# Altium PCB FLYING_DIVING.PcbDoc
Units mm, origin at the board's own origin, x right, y up, seen from the top; angles counter-clockwise.
Board outline 100.23 x 49.95 mm, 2 copper layers (Top Layer, Bottom Layer); 22 components, 41 nets, 142 pads, 43 vias.
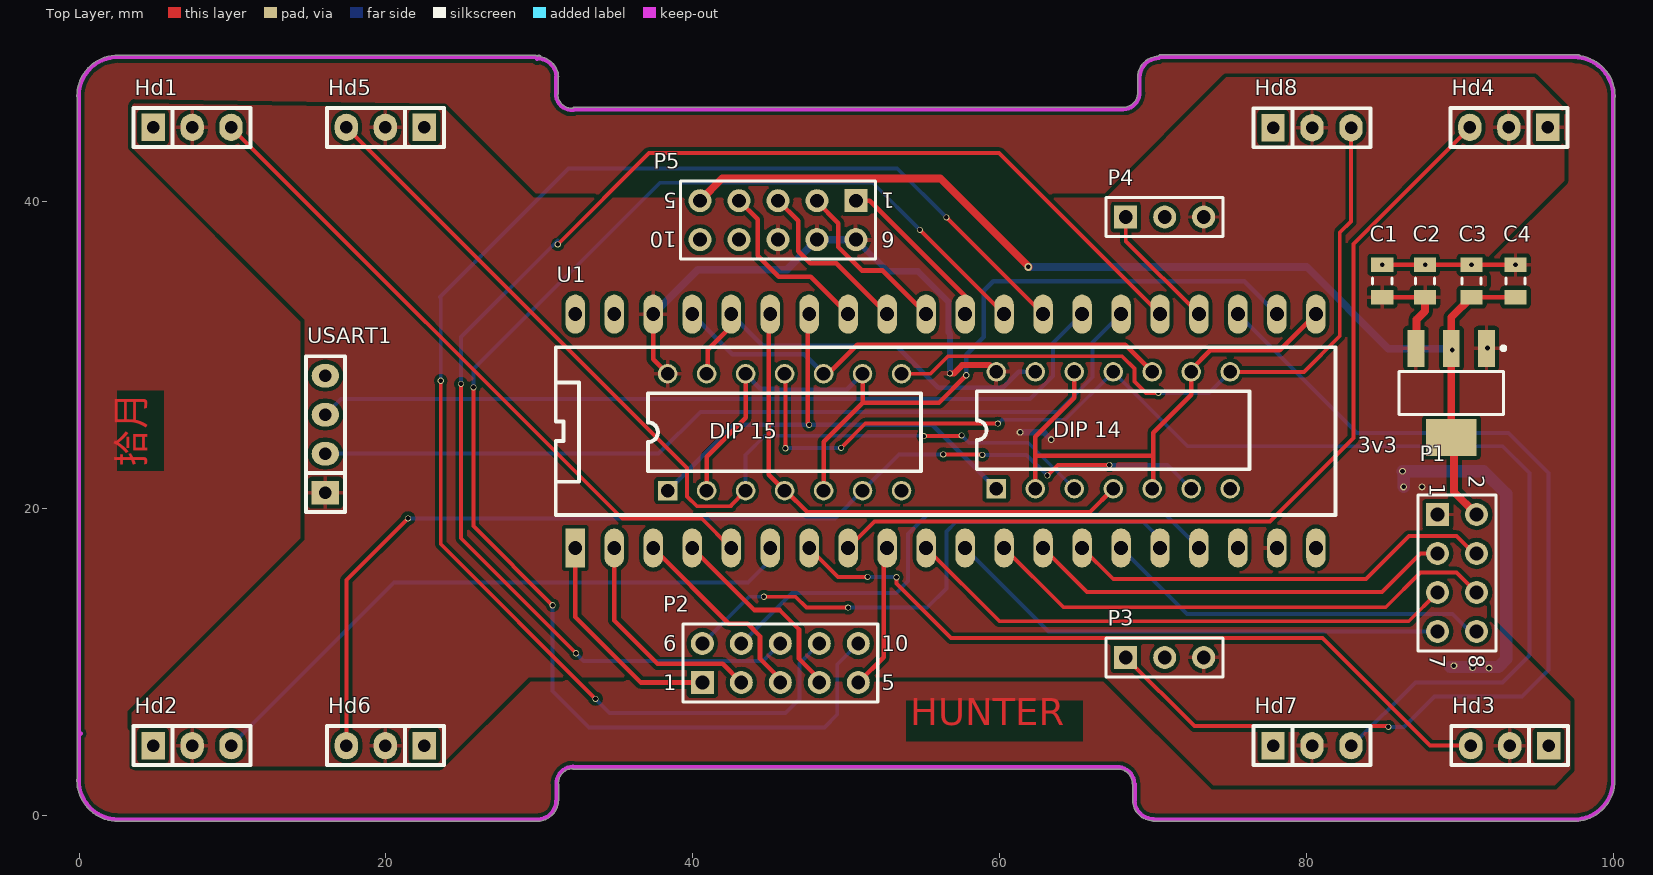
[diagram p0: Top Layer view]
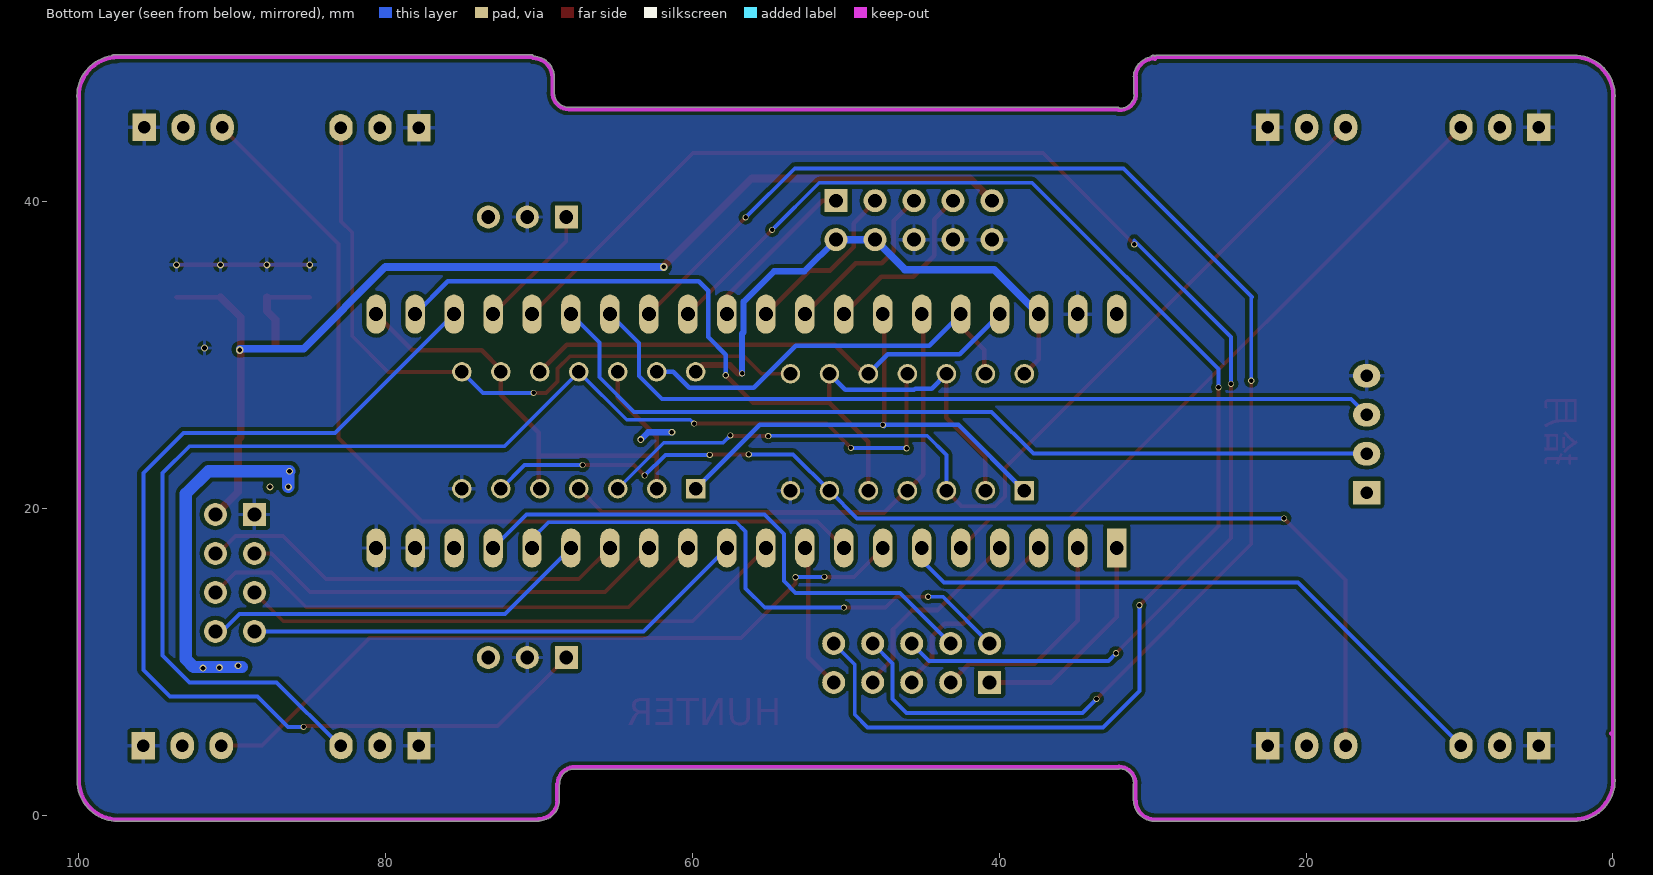
[diagram p1: Bottom Layer view, seen from below]

## Layer stack, top to bottom
Top Solder: solder mask 0.0102, Solder Resist, Dk 3.5
Top Layer: signal copper 0.0356
Dielectric 1: dielectric 0.32, FR-4, Dk 4.8
Bottom Layer: signal copper 0.0356
Bottom Solder: solder mask 0.0102, Solder Resist, Dk 3.5

## Board outline
2.54,-0.381 29.845,-0.381 ccw(c29.845,-0.254) 29.883,-0.376 ccw(c29.921,-0.254) 29.928,-0.381 ccw(c29.856,0.992) 31.227,0.892 ccw(c31.115,0.953) 31.242,0.953 31.242,2.032 ccw(c31.115,2.032) 31.242,2.04 ccw(c32.195,2.095) 31.242,2.039 31.242,2.04 cw(c32.195,2.095) 32.12,3.047 ccw(c32.195,3.15) 32.195,3.022 67.615,3.022 ccw(c67.615,3.15) 67.623,3.022 cw(c67.678,2.07) 68.632,2.081 ccw(c68.76,2.083) 68.668,1.995 68.668,1.028 ccw(c68.77,0.953) 68.643,0.946 ccw(c70.016,1.018) 69.951,-0.355 ccw(c70.028,-0.254) 70.028,-0.381 97.341,-0.381 ccw(c97.396,-0.267) 97.396,-0.394 ccw(c97.396,2.286) 100.076,2.286 100.076,46.795 ccw(c99.962,46.85) 100.089,46.85 ccw(c97.409,46.85) 97.82,49.499 ccw(c97.714,49.428) 97.714,49.556 70.445,49.556 ccw(c70.445,49.428) 70.355,49.518 70.304,49.467 ccw(c70.36,48.094) 69.003,48.315 ccw(c69.099,48.231) 68.971,48.231 68.971,47.152 ccw(c69.099,47.152) 68.971,47.144 ccw(c68.019,47.088) 68.971,47.144 cw(c68.019,47.088) 68.973,47.088 cw(c68.019,47.088) 68.031,46.134 cw(c68.019,47.088) 68.03,46.134 68.032,46.134 32.266,46.134 ccw(c32.266,46.007) 32.175,46.097 32.176,46.097 32.153,46.074 cw(c32.144,47.028) 31.193,46.953 ccw(c31.091,47.029) 31.218,47.029 31.218,48.058 ccw(c31.115,48.133) 31.242,48.133 ccw(c31.115,48.133) 31.242,48.14 ccw(c29.869,48.067) 30.098,49.423 ccw(c29.972,49.403) 29.882,49.493 29.854,49.466 ccw(c29.743,49.403) 29.743,49.53 2.595,49.53 ccw(c2.54,49.416) 2.54,49.543 ccw(c2.54,46.863) -0.14,46.863 ccw(c-0.013,46.863) -0.127,46.808 -0.127,2.354 ccw(c-0.013,2.299) -0.14,2.299 ccw(c2.54,2.299)

## Design rules (kind name [scope] priority, off if disabled: settings)
Clearance [All] p1: gap=0.254 ignorepadtopadclearanceinfootprint=FALSE except(0: Arc-Hole Track-Hole SMDPad-Hole THPad-Hole Via-Hole Fill-Hole Poly-Hole Region-Hole Text-Hole)
ComponentClearance [All] p1 off: gap=0.254 collisioncheckmode=3 verticalgap=0.254 showdistances=FALSE
PolygonConnect [All] p1: connectstyle=Relief reliefconductorwidth=0.254 reliefentries=4 polygonreliefangle="90 Angle" airgapwidth=0.254
RoutingVias [All] p1: holewidth=0.711 width=1.27 viastyle="Through Hole" minholewidth=0.3 minwidth=0.3 maxholewidth=10 maxwidth=10
SolderMaskExpansion [All] p1: expansion=0.102
Width [All] p1: maxlimit=10 minlimit=0.254 preferedwidth=0.254
29 further rules are at their usual default settings.

## Components (designator, comment, footprint, x,y, rotation, side; value= is the part's Value field where it differs from the comment)
3v3 "AMS1117-" AMS1117- 89.408,27.534 r270 top
C1 "10u" 0805电容 84.912,34.823 r90 top
C2 "0.1u" 0805电容 87.706,34.823 r90 top
C3 "10u" 0805电容 90.729,34.823 r90 top
C4 "0.1u" 0805电容 93.599,34.823 r90 top
"DIP 14" "74HC08_S1" "DIP 14" 67.666,25.349 r90 top
"DIP 15" "74HC08_S2" "DIP 14" 46.253,25.222 r90 top
Hd1 "Header3" Header3 7.366,44.831 r0 top
Hd2 "Header3" Header3 7.366,4.547 r0 top
Hd3 "Header3" Header3 93.218,4.547 r180 top
Hd4 "Header3" Header3 93.167,44.831 r180 top
Hd5 "Header3" Header3 19.964,44.831 r180 top
Hd6 "Header3" Header3 19.964,4.547 r180 top
Hd7 "Header3" Header3 80.34,4.547 r0 top
Hd8 "Header3" Header3 80.34,44.806 r0 top
P1 "NRF24L01" HDR2X4 88.519,19.609 r270 top
P2 "Connector1" HDR2X5_CEN 40.615,8.661 r0 top
P3 "M1" HDR1X3 68.199,10.287 r0 top
P4 "M2" HDR1X3 68.199,38.989 r0 top
P5 "Connector2" HDR2X5_CEN 50.622,40.056 r180 top
U1 "STM32F103C8T6" DIP40 32.334,17.424 r90 top
USART1 "Header4" Header4 16.053,24.841 r90 top

## Footprints (in the part's own frame and the unit in brackets; to place one, negate y for a bottom-side part, rotate by r counter-clockwise, add the part's x,y. Pads: shape width x height; smd on the part's side, far side on the other; paste and mask are expansions set on the pad)
0805电容 [mm]
  rect 0.95x1.45 smd: 1(-1.05,0) 2(1.05,0)
  silkscreen extent -0.2,-0.63 0.2,0.63, body extent -1.1,-0.7 1.1,0.7, height 0.5
AMS1117- [mm]
  rect 2.4x1.1 smd: 1(-2.9,2.3) 2(-2.9,0) 3(-2.9,-2.3)
  rect 2.4x3.3 smd: 4(2.9,0)
  silkscreen extent -3.02,-3.4 1.4,3.53, body extent -1.86,-3.4 1.86,3.4, height 1.8
DIP40 [mm]
  rect 2.54x1.27 hole 0.9: 1(0,0)
  oval 2.54x1.27 hole 0.9: 2(0,-2.54) 3(0,-5.08) 4(0,-7.62) 5(0,-10.16) 6(0,-12.7) 7(0,-15.24) 8(0,-17.78) 9(0,-20.32) 10(0,-22.86) 11(0,-25.4) 12(0,-27.94) 13(0,-30.48) 14(0,-33.02) 15(0,-35.56) 16(0,-38.1) 17(0,-40.64) 18(0,-43.18) 19(0,-45.72) 20(0,-48.26) 21(15.24,-48.26) 22(15.24,-45.72) 23(15.24,-43.18) 24(15.24,-40.64) 25(15.24,-38.1) 26(15.24,-35.56) 27(15.24,-33.02) 28(15.24,-30.48) 29(15.24,-27.94) 30(15.24,-25.4) 31(15.24,-22.86) 32(15.24,-20.32) 33(15.24,-17.78) 34(15.24,-15.24) 35(15.24,-12.7) 36(15.24,-10.16) 37(15.24,-7.62) 38(15.24,-5.08) 39(15.24,-2.54) 40(15.24,0)
  silkscreen extent 2.16,-49.53 13.08,1.27
"DIP 14" [mm]
  rect 1.27x1.27 hole 0.9: 1(-4.064,7.899)
  round 1.27 hole 0.9: 2(-4.064,5.359) 3(-4.064,2.819) 4(-4.064,0.279) 5(-4.064,-2.261) 6(-4.064,-4.801) 7(-4.064,-7.341) 8(3.556,-7.341) 9(3.556,-4.801) 10(3.556,-2.261) 11(3.556,0.279) 12(3.556,2.819) 13(3.556,5.359) 14(3.556,7.899)
  silkscreen extent -2.79,-8.61 2.29,9.17
HDR1X3 [mm] "Connector; Header; 3 Position"
  rect 1.5x1.5 hole 0.9: 1(0,0)
  round 1.5 hole 0.9: 2(2.54,0) 3(5.08,0)
  silkscreen extent -1.27,-1.27 6.35,1.27
HDR2X4 [mm] "Connector; Header; 4x2 Position"
  rect 1.5x1.5 hole 0.9: 1(0,0)
  round 1.5 hole 0.9: 2(0,2.54) 3(2.54,0) 4(2.54,2.54) 5(5.08,0) 6(5.08,2.54) 7(7.62,0) 8(7.62,2.54)
  silkscreen extent -1.27,-1.27 8.89,3.81
HDR2X5_CEN [mm] "Connector; Header; 5x2 Position"
  rect 1.5x1.5 hole 0.9: 1(0,0)
  round 1.5 hole 0.9: 2(2.54,0) 3(5.08,0) 4(7.62,0) 5(10.16,0) 6(0,2.54) 7(2.54,2.54) 8(5.08,2.54) 9(7.62,2.54) 10(10.16,2.54)
  silkscreen extent -1.27,-1.27 11.43,3.81
Header3 [mil]
  rect 60x70 hole 32: 1(-100,0)
  oval 60x70 hole 32: 2(0,0) 3(100,0)
  silkscreen extent -150,-50 150,50
Header4 [mil]
  rect 60x70 hole 32: 1(-150,0)
  oval 60x70 hole 32: 2(-50,0) 3(50,0) 4(150,0)
  silkscreen extent -200,-50 200,50

## Part data
C1 C2 C3 C4: library part 0805电容
"DIP 14" "DIP 15": library part "DIP 14"
P1: library part "Header 4X2", "Header, 4-Pin, Dual row", LatestRevisionDate=17-Jul-2002, LatestRevisionNote="Re-released for DXP Platform.", Publisher="Altium Limited"
P2 P5: library part "Header 5X2A", "Header, 5-Pin, Dual row", LatestRevisionDate=17-Jul-2002, LatestRevisionNote="Re-released for DXP Platform.", Publisher="Altium Limited"
P3 P4: library part "Header 3", "Header, 3-Pin", LatestRevisionDate=17-Jul-2002, LatestRevisionNote="Re-released for DXP Platform.", Publisher="Altium Limited"

## Via types
v1: diameter 0.4, hole 0.3, Top Layer to Bottom Layer, 28 vias
v2: diameter 0.45, hole 0.3, Top Layer to Bottom Layer, 13 vias
v3: diameter 0.5, hole 0.3, Top Layer to Bottom Layer, 2 vias

## Nets (pads, with @x,y where several pads share a name; then routed paths per layer and width w, separated by ;. In a path a pad name is that pad's centre, name@x,y a point inside that pad or via, vN(x,y) a via of type N, cw(c..) or ccw(c..) an arc to the next point about the centre after c; other vN are vias at no path point)
1: P2.1 U1.1 | length 14.5
  Top Layer w0.3: U1.1 32.334,12.929 36.601,8.661 P2.1
2: P2.2 U1.2 | length 14.7
  Top Layer w0.3: U1.2 34.874,12.7 37.694,9.881 41.935,9.881 P2.2
3: P2.3 U1.3 | length 12.9
  Top Layer w0.3: U1.3 42.342,12.497 43.561,12.497 44.374,11.684 44.374,10.211 45.695,8.89 P2.3
3V3: 3v3.2 3v3.4 C3.1 C4.1 P1.2 P5.5 | length 72.5
  Top Layer w0.3: C3.1 C4.1
  Top Layer w0.5: P5.5 41.91,41.504 56.109,41.504 61.874,35.738 v3(61.849,35.738) ; 3v3.2@89.408,30.328 3v3.4 89.586,24.456 89.586,21.082 P1.2 ; 3v3.2 89.408,32.453 C3.1
  Bottom Layer w0.5: v3(61.849,35.738) 79.985,35.738 85.319,30.404 89.484,30.404 v3(89.484,30.328)
4: P2.4 U1.4 | length 13.2
  Top Layer w0.3: U1.4 43.993,13.386 45.644,13.386 46.914,12.116 46.914,10.211 48.235,8.89 P2.4
9: P2.5 U1.9 | length 9.5
  Top Layer w0.3: P2.5 52.426,10.312 52.426,17.196 U1.9
16: P2.6 U1.16 | length 37
  Top Layer w0.254: v1(44.628,14.249) 46.685,14.249 47.396,13.538 v1(50.114,13.538)
  Bottom Layer w0.254: P2.6 43.663,14.249 v1(44.628,14.249) ; v1@50.165,13.589 v1(50.114,13.538) 55.27,13.538 56.515,14.783 56.515,18.491 57.125,19.101 69.367,19.101 70.434,18.034 U1.16
17: P2.7 U1.17 | length 36
  Bottom Layer w0.254: P2.7 46.457,14.503 53.264,14.503 54.026,15.265 54.026,18.339 55.296,19.609 70.79,19.609 U1.17
25: P2.8 U1.25 | length 93.1
  Top Layer w0.254: v1(24.892,28.118) 24.892,18.059 v1(32.385,10.566) ; v1(31.191,37.211) 37.135,43.155 59.944,43.155 U1.25
  Bottom Layer w0.254: v1(24.892,28.118) 24.892,31.166 31.191,37.465 v1(31.191,37.211) ; v1(32.385,10.566) 32.881,10.07 44.564,10.07 P2.8 P2.8@45.695,10.998
28: P2.9 U1.28 | length 95.3
  Top Layer w0.254: v1(23.571,28.321) 23.571,17.678 v1(33.655,7.595) ; v1(56.515,38.964) U1.28
  Bottom Layer w0.254: v1(23.571,28.321) 23.571,33.731 23.52,33.782 31.902,42.164 53.315,42.164 v1(56.515,38.964) ; v1(33.655,7.595) 34.569,6.68 46.025,6.68 46.939,7.595 46.939,9.906 P2.9
29: P2.10 U1.29 | length 91.3
  Top Layer w0.254: v1(25.705,27.889) 25.705,18.847 v1(30.861,13.691) ; v1(54.788,38.151) U1.29
  Bottom Layer w0.254: v1(25.705,27.889) 25.705,29.083 37.846,41.224 51.714,41.224 v1(54.788,38.151) ; v1(30.861,13.691) 30.861,8.103 33.223,5.74 48.565,5.74 49.403,6.579 49.403,9.83 P2.10
30: P5.1 U1.30 | length 10.9
  Top Layer w0.3: P5.1 51.511,40.056 57.734,33.833 U1.30
31: P5.2 U1.31 | length 11.1
  Top Layer w0.3: P5.2 48.082,39.98 49.468,38.594 49.468,37.038 50.997,35.509 52.349,35.509 U1.31
32: P5.3 U1.32 | length 11.3
  Top Layer w0.3: P5.3 46.863,38.735 46.863,36.754 47.65,35.966 49.352,35.966 U1.32
33: P5.4 U1.33 | length 11.6
  Top Layer w0.3: P5.4 44.221,38.837 44.221,36.474 45.593,35.103 47.676,35.103 U1.33
CE: P1.3 U1.13 | length 27.9
  Top Layer w0.254: U1.13 65.684,14.554 84.887,14.554 87.401,17.069 P1.3
CSN: P1.4 U1.14 | length 28.2
  Top Layer w0.254: U1.14 67.386,15.392 83.845,15.392 86.653,18.2 89.75,18.2 90.881,17.069 P1.4
GND: 3v3.1 "DIP 14.7" "DIP 15.7" C1.2 C2.2 C3.2 C4.2 Hd1.1 Hd2.1 Hd3.1 Hd4.1 Hd5.1 Hd6.1 Hd7.1 Hd8.1 P1.1 P3.2 P4.2 P5.8 P5.9 P5.10 U1.19 U1.20 U1.39 USART1.4 | length 9
  Top Layer w0.3: Hd7.1 Hd7.1@78.054,4.801 ; v2(84.912,35.873) v2(87.706,35.873) v2(90.729,35.873) v2(93.599,35.873)
  other v2: 91.77,30.455
IRQ: P1.8 U1.15 | length 25.4
  Bottom Layer w0.254: U1.15 72.187,13.132 89.484,13.132 90.627,11.989 P1.8
MISO: P1.7 U1.11 | length 33
  Bottom Layer w0.254: U1.11 63.17,11.989 P1.7
MOSI: P1.6 U1.12 | length 33.9
  Top Layer w0.254: U1.12 64.135,13.564 85.141,13.564 87.401,15.824 89.764,15.824 P1.6
PA0: Hd1.3 U1.5 | length 43.9
  Top Layer w0.254: Hd1.3 35.408,19.329 40.589,19.329 U1.5
PA1: Hd2.3 U1.6 | length 40.9
  Bottom Layer w0.254: Hd2.3 20.523,15.164 43.586,15.164 45.034,16.612 U1.6
PA2: Hd3.3 U1.7 | length 48.7
  Top Layer w0.254: U1.7 49.454,15.545 v1(51.384,15.545) ; v1(53.264,15.519) 53.264,15.113 56.82,11.557 81.026,11.557 88.036,4.547 Hd3.3
  Bottom Layer w0.254: v1(51.384,15.545) 53.238,15.545 v1(53.264,15.519)
PA3: Hd4.3 U1.8 | length 59.3
  Top Layer w0.254: U1.8 51.841,19.152 77.597,19.152 83.033,24.587 83.033,37.236 Hd4.3
PB6: "DIP 14.1" "DIP 15.1" U1.34 | length 32.4
  Top Layer w0.3: v1(47.574,25.451) 47.475,25.55 47.475,32.566 U1.34
  Bottom Layer w0.3: 38.354,21.158 42.647,25.451 v1(47.574,25.451) ; v1@47.473,25.349 v1(47.574,25.451) ; 59.767,21.285 55.601,25.451 v1(47.574,25.451)
PB6_OUT: "DIP 14.3" "DIP 15.3" Hd5.3 | length 63.5
  Top Layer w0.254: Hd5.3 39.624,22.631 39.624,20.777 40.259,20.142 42.469,20.142 42.444,20.167 43.434,21.158 ; v1(55.042,24.714) 57.455,24.714 v1(57.506,24.765)
  Bottom Layer w0.254: 43.434,21.158 43.434,23.495 44.679,24.74 55.042,24.74 v1(55.042,24.714) ; v1(57.506,24.765) 57.988,24.282 61.849,24.282 64.847,21.285
PB7: "DIP 14.4" "DIP 15.4" U1.35 | length 34.6
  Top Layer w0.3: U1.35 44.935,32.566 44.935,22.197 45.974,21.158 46.05,21.158 47.473,19.736 65.837,19.736 67.387,21.285
PB7_OUT: "DIP 14.6" "DIP 15.6" Hd6.3 | length 70.7
  Top Layer w0.254: Hd6.3 17.424,15.342 v1(21.438,19.355) ; v1(56.312,23.52) 58.826,23.52 v1(58.852,23.495) ; v1(63.094,22.149) 63.779,22.835 v1(67.132,22.835)
  Bottom Layer w0.254: v1(21.438,19.355) 49.251,19.355 51.054,21.158 53.417,23.52 v1(56.312,23.52) ; v1(58.852,23.495) 61.747,23.495 v1(63.094,22.149) ; v1(67.132,22.835) 70.917,22.835 72.467,21.285
PB8: "DIP 14.13" "DIP 15.13" U1.36 | length 26.8
  Top Layer w0.3: 40.894,28.778 40.97,28.854 40.97,30.353 42.494,31.877 U1.36
  Bottom Layer w0.3: U1.36 44.556,30.602 53.24,30.602 55.976,27.866 60.197,27.866 61.236,28.905 62.307,28.905
PB8_OUT: "DIP 14.11" "DIP 15.11" Hd7.3 | length 84.2
  Top Layer w0.254: 45.974,28.778 46.025,28.728 v1(46.025,23.927) ; v1(49.657,23.952) 51.232,25.527 v1(59.868,25.527)
  Bottom Layer w0.254: v1(46.025,23.927) 46.076,23.876 46.152,23.952 v1(49.657,23.952) ; v1(59.868,25.527) 60.122,25.781 64.262,25.781 67.387,28.905 72.238,24.054 92.761,24.054 94.513,22.301 94.513,10.414 92.761,8.661 87.071,8.661 82.956,4.547 Hd7.3
PB9: "DIP 14.10" "DIP 15.10" U1.37 | length 33.1
  Top Layer w0.3: 48.514,28.778 48.819,28.778 50.698,30.658 68.174,30.658 69.927,28.905
  Bottom Layer w0.3: U1.37 42.57,30.048 47.244,30.048 48.514,28.778
PB9_OUT: "DIP 14.8" "DIP 15.8" Hd8.3 | length 45.9
  Top Layer w0.254: 53.594,28.778 55.474,28.778 56.617,29.921 67.97,29.921 68.783,29.108 68.783,28.27 69.52,27.534 v1(70.333,27.534) ; 75.007,28.905 79.807,28.905 82.144,31.242 82.144,37.973 82.88,38.71 Hd8.3
  Bottom Layer w0.254: v1(70.333,27.534) 73.635,27.534 75.007,28.905
RX: U1.26 USART1.2 | length 56.9
  Bottom Layer w0.254: USART1.2 37.77,23.571 40.488,26.289 63.779,26.289 66.04,28.55 66.04,30.81 U1.26
S1: "DIP 14.2" "DIP 14.5" "DIP 14.9" "DIP 14.12" U1.21 | length 34.9
  Top Layer w0.3: 62.307,21.285 62.307,23.393 ; 64.847,28.905 64.847,27.204 62.307,24.664 62.307,23.393 ; 69.927,21.285 70.002,21.361 70.002,23.317 ; U1.21 78.232,30.302 73.711,30.302 72.467,29.058 72.467,28.905 72.467,27.407 70.002,24.943 70.002,23.317 ; 62.307,23.393 62.352,23.439 69.881,23.439 70.002,23.317
S2: "DIP 15.2" "DIP 15.5" "DIP 15.9" "DIP 15.12" U1.22 | length 59.6
  Top Layer w0.3: 40.894,21.158 40.894,23.368 43.434,25.908 43.434,28.778 ; 48.514,21.158 48.514,24.359 51.054,26.899 ; 51.054,28.778 51.054,26.899 ; v1(57.81,28.677) 56.033,26.899 51.054,26.899
  Bottom Layer w0.3: 43.434,28.778 44.4,27.813 45.47,27.813 45.544,27.739 50.015,27.739 51.054,28.778 ; 48.412,21.158 48.514,21.158 ; v1(57.81,28.677) 57.81,30.028 58.953,31.171 58.953,34.188 59.563,34.798 75.921,34.798 U1.22
SCK: P1.5 U1.10 | length 36.1
  Top Layer w0.254: U1.10 59.969,12.649 86.639,12.649 P1.5
TX: U1.27 USART1.3 | length 53.3
  Bottom Layer w0.254: USART1.3 17.069,27.127 61.976,27.127 63.475,28.626 63.475,30.785 U1.27
VCC: 3v3.3 "DIP 14.14" "DIP 15.14" C1.1 C2.1 Hd1.2 Hd2.2 Hd3.2 Hd4.2 Hd5.2 Hd6.2 Hd7.2 Hd8.2 P3.3 P4.3 P5.6 P5.7 U1.38 USART1.1 | length 67
  Top Layer w0.3: U1.38 37.414,29.718 38.354,28.778 ; C1.1 C2.1
  Top Layer w0.4: v1(56.744,28.804) 57.013,28.804 57.549,29.34 59.332,29.34 59.767,28.905
  Top Layer w0.5: 3v3.3 87.147,30.473 87.147,32.309 87.706,32.868 C2.1
  Bottom Layer w0.4: P5.6 52.68,35.458 54.661,35.458 56.645,33.474 56.645,31.48 56.744,31.382 v1(56.744,28.804) ; v2(61.316,24.968) 62.865,24.968 v2(63.348,24.486)
  Bottom Layer w0.5: U1.38 40.31,35.56 46.126,35.56 P5.7 P5.6
  Bottom Layer w0.8: v2(86.309,21.412) 86.309,22.352 v2(86.233,22.428) 91.516,22.428 92.989,20.955 92.989,10.185 92.481,9.677 89.332,9.677
  other v2: 91.872,9.601 90.805,9.627 89.586,9.754 87.503,21.412
WATER1: P3.1 U1.23 | length 68.3
  Top Layer w0.254: P3.1 72.669,5.817 85.268,5.817 v1(85.319,5.766)
  Bottom Layer w0.254: U1.23 83.261,24.917 93.142,24.917 95.758,22.301 95.758,9.474 94.031,7.747 88.316,7.747 86.335,5.766 v1(85.319,5.766)
WATER2: P4.1 U1.24 | length 8.3
  Top Layer w0.254: P4.1 68.199,37.44 U1.24
pads on no net: U1.18 U1.40

## Polygon pours and split planes (outlines as drawn)
VCC on Top Layer "Bottom Layer-No Net" (solid, remove dead copper, pour order 10): 3.429,46.406 3.48,46.355 3.48,43.51 14.707,32.283 14.707,17.958 3.429,6.68 3.429,5.766 3.556,5.639 3.556,3.124 3.632,3.2 23.495,3.2 29.312,9.017 66.929,9.017 66.929,8.941 73.914,1.956 96.139,1.956 97.18,2.997 97.18,7.442 91.719,12.903 91.719,36.297 96.774,41.351 96.774,46.126 94.818,48.082 74.752,48.082 66.929,40.259 29.642,40.259 23.774,46.126
GND on Top Layer "Bottom Layer-No Net" (solid, remove dead copper, pour order 14): 0.279,49.682 0.279,-0.584 0.025,-0.838 0.102,-0.914 100.482,-0.914 100.482,49.098 99.898,49.682
GND on Bottom Layer "Bottom Layer-No Net" (solid, remove dead copper, pour order 12): 0.127,49.632 0.127,-0.178 -0.127,-0.432 101.168,-0.432 100.609,0.127 100.609,50.089

## Keep-outs
Keep-Out Layer:
  lines w0.254: -0.013,2.299 ccw(c2.54,2.299) 2.54,-0.254 29.845,-0.254 ; -0.013,46.863 cw(c2.54,46.863) 2.54,49.416 ; 0,2.299 0,46.99 ; 0,5.207 0.127,5.334 ; 2.54,49.403 29.743,49.403 ; 29.845,49.276 29.972,49.403 ; 29.869,49.315 cw(c29.869,48.067) 31.115,48.133 ; 29.921,-0.254 ccw(c29.856,0.992) 31.103,0.992 ; 31.062,47.015 ccw(c32.144,47.028) 32.207,45.949 32.266,46.007 68.032,46.007 ccw(c68.019,47.088) 69.099,47.152 69.099,48.231 ; 31.091,0.928 31.115,0.953 31.115,2.032 cw(c32.195,2.095) 32.182,3.177 ; 31.091,47.029 31.091,48.109 ; 32.195,3.15 67.615,3.15 cw(c67.678,2.07) 68.76,2.083 ; 68.77,0.952 ccw(c70.016,1.018) 70.016,-0.23 ; 68.795,0.977 68.795,2.056 ; 69.123,48.255 cw(c70.36,48.094) 70.358,49.341 70.445,49.428 97.714,49.428 ; 70.028,-0.254 97.396,-0.254 ; 97.396,-0.267 ccw(c97.396,2.286) 99.949,2.286 99.949,46.85 ; 97.409,49.403 cw(c97.409,46.85) 99.962,46.85

## Other copper
Top Layer:
  text "拾月" at 4.851,22.708 h3 r90
  text "HUNTER" at 54.153,5.283 h3

## Silkscreen, mask and mechanical layers (free items; w line width, h text height)
Top Solder:
  text "拾月" at 4.851,22.708 h3 r90
  text "HUNTER" at 54.153,5.283 h3

## Text inside footprints (layer, text, board x,y; h text height)
P1: Top Overlay "8" at 90.551,10.465 h1 r270; Top Overlay "7" at 88.011,10.465 h1 r270; Top Overlay "1" at 88.011,21.641 h1 r270; Top Overlay "2" at 90.551,22.149 h1 r270
P2: Top Overlay "1" at 38.075,8.153 h1; Top Overlay "5" at 52.299,8.153 h1; Top Overlay "10" at 52.299,10.693 h1; Top Overlay "6" at 38.075,10.693 h1
P5: Top Overlay "1" at 53.162,40.564 h1 r180; Top Overlay "5" at 38.938,40.564 h1 r180; Top Overlay "10" at 38.938,38.024 h1 r180; Top Overlay "6" at 53.162,38.024 h1 r180